# Altium PCB VapeixShield.PcbDoc
Units mm, origin at the board's own origin, x right, y up, seen from the top; angles counter-clockwise.
Board outline 70.15 x 53.67 mm, 4 copper layers (Top Layer, Mid-Layer1, Mid-Layer2, Bottom Layer), stack 1.582 mm thick; 81 components, 77 nets, 275 pads, 86 vias.
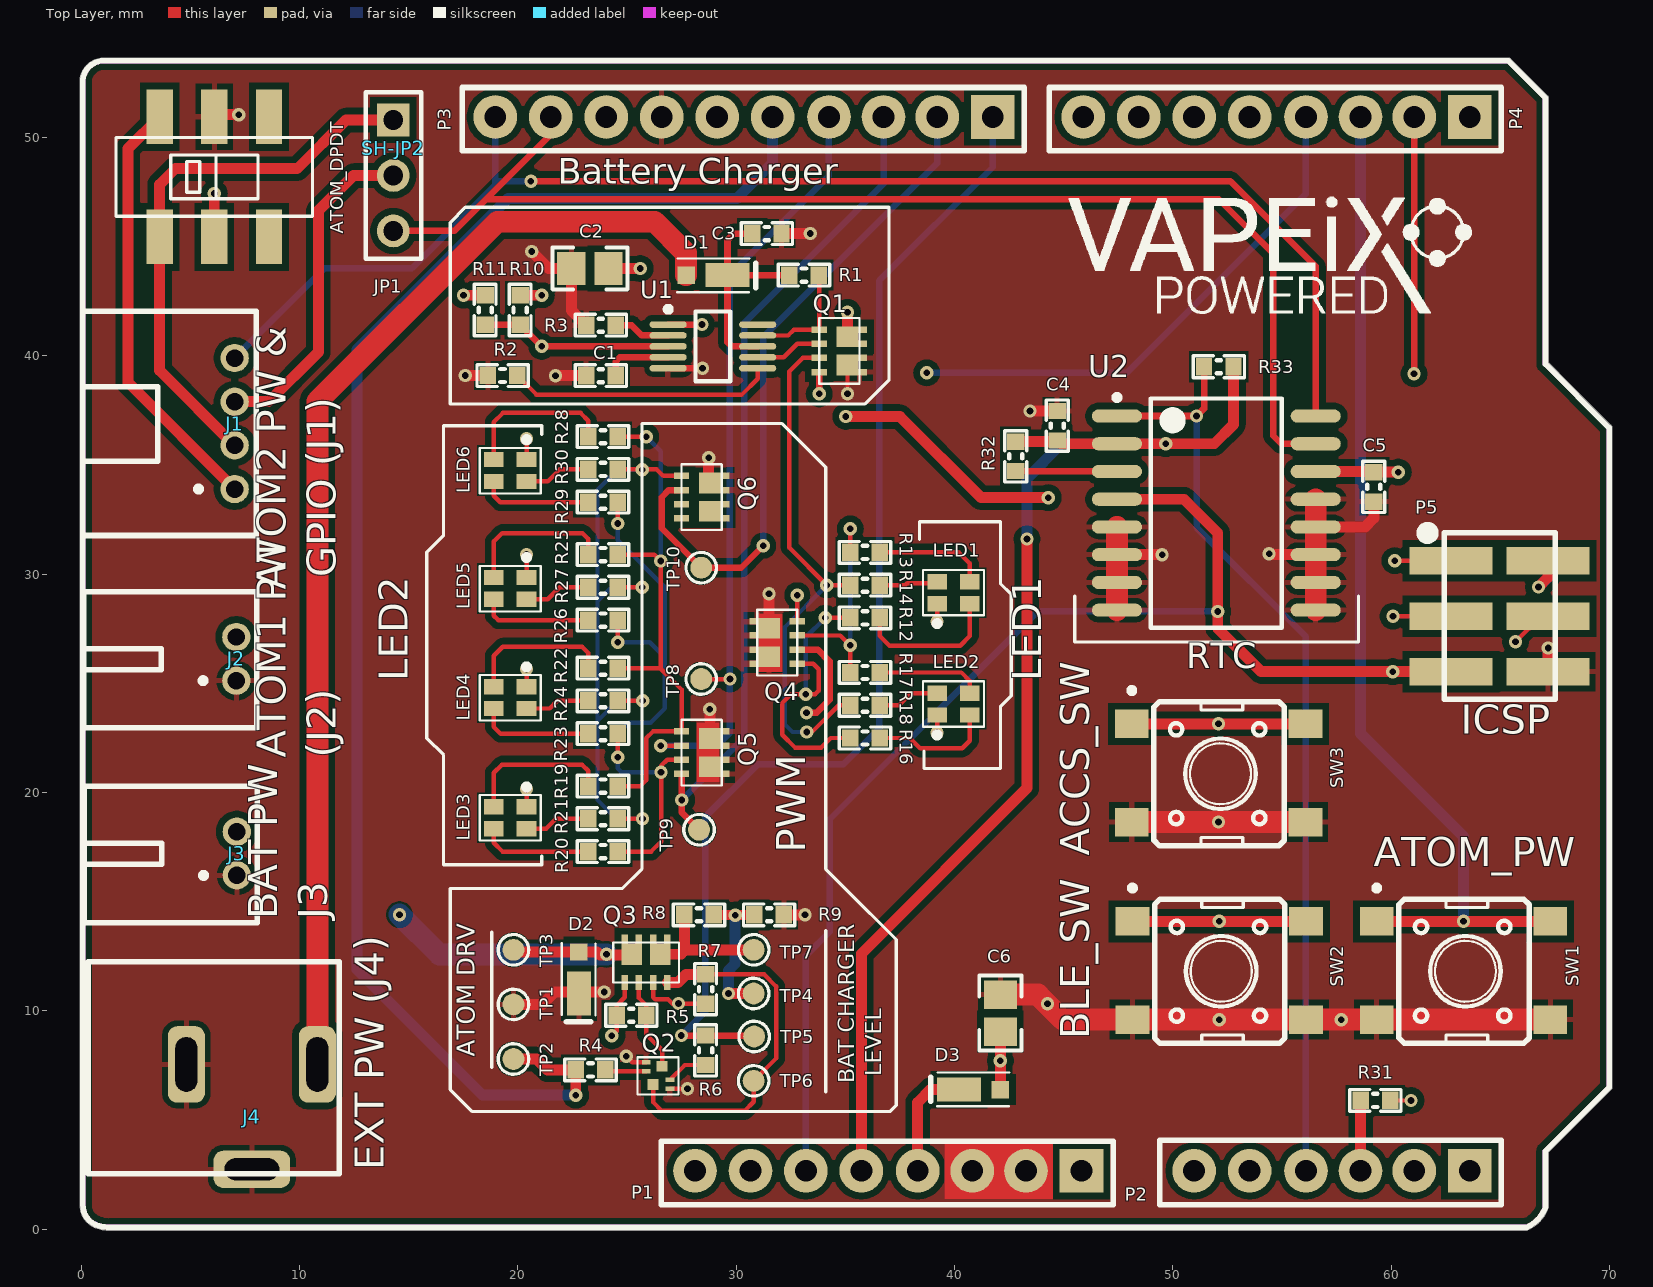
[diagram p0: Top Layer view]
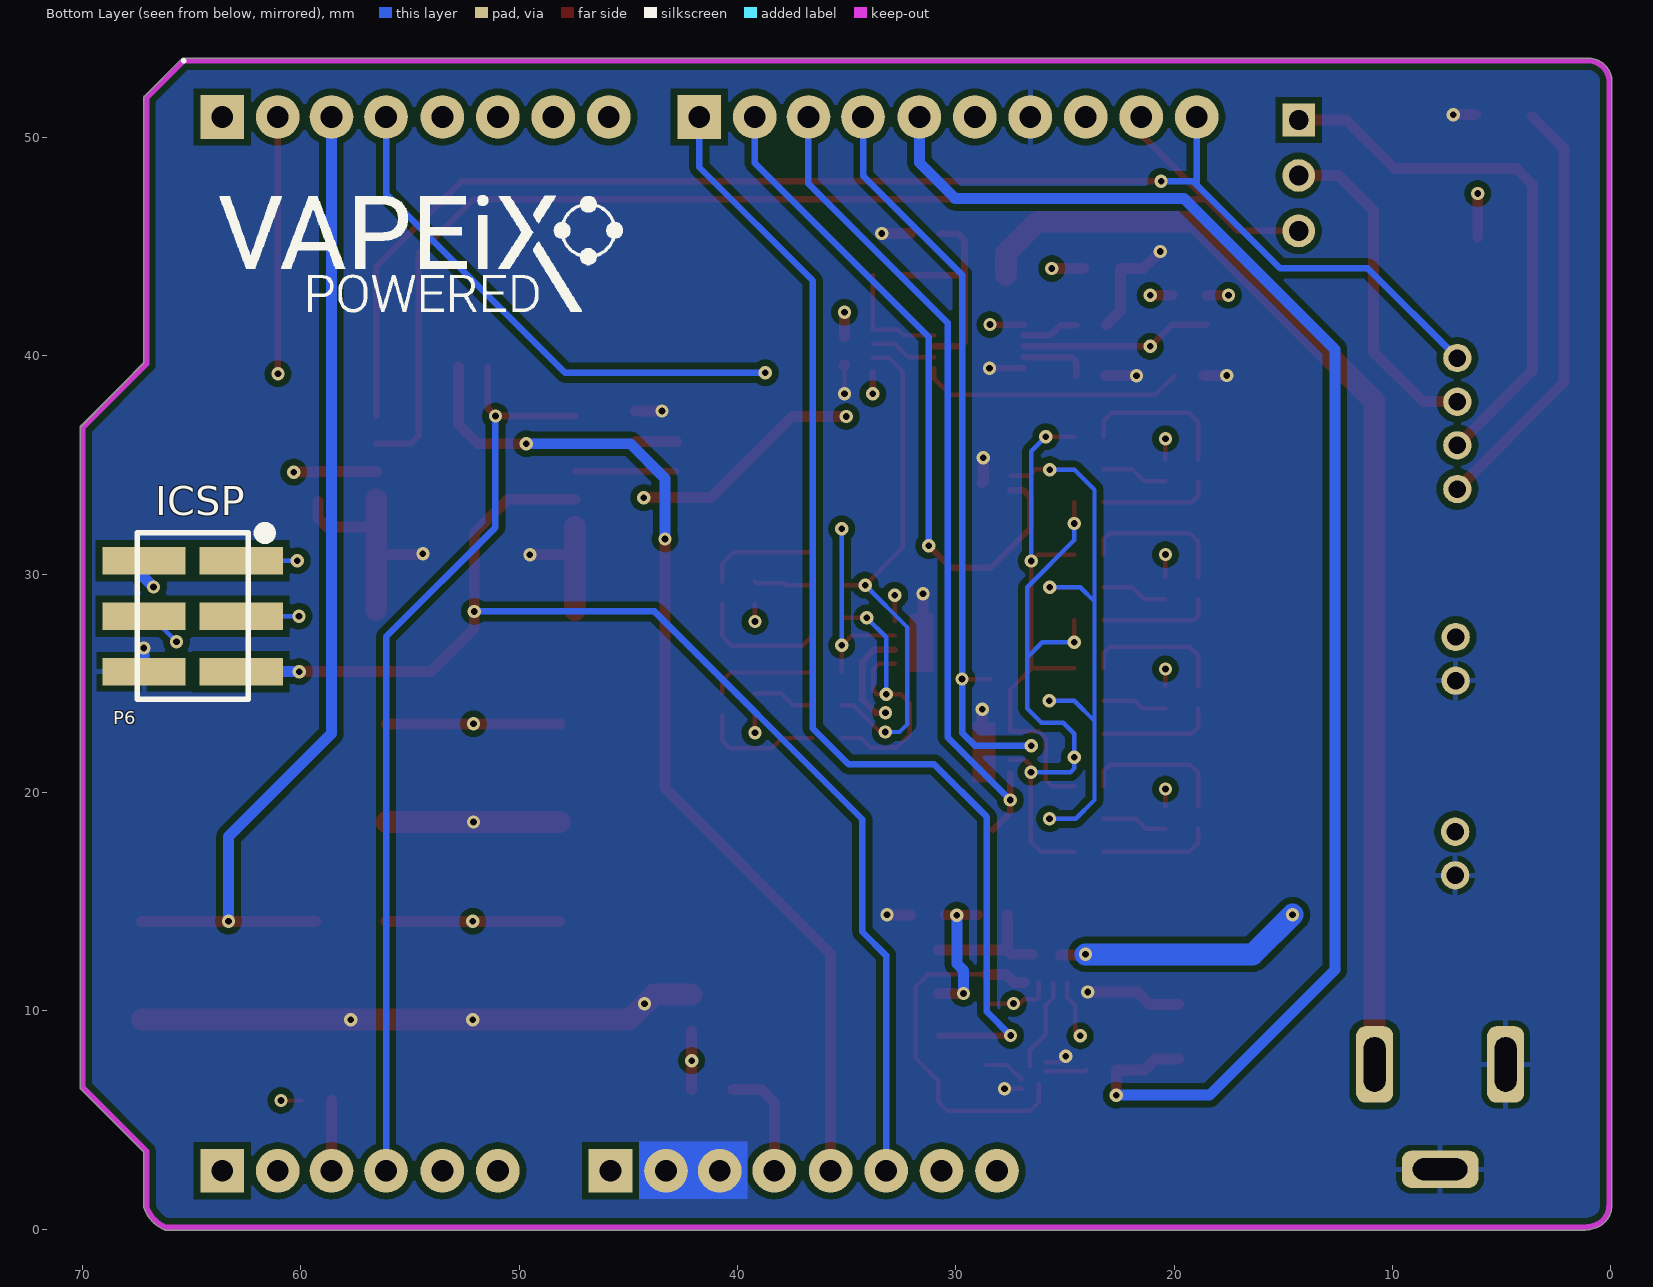
[diagram p1: Bottom Layer view, seen from below]
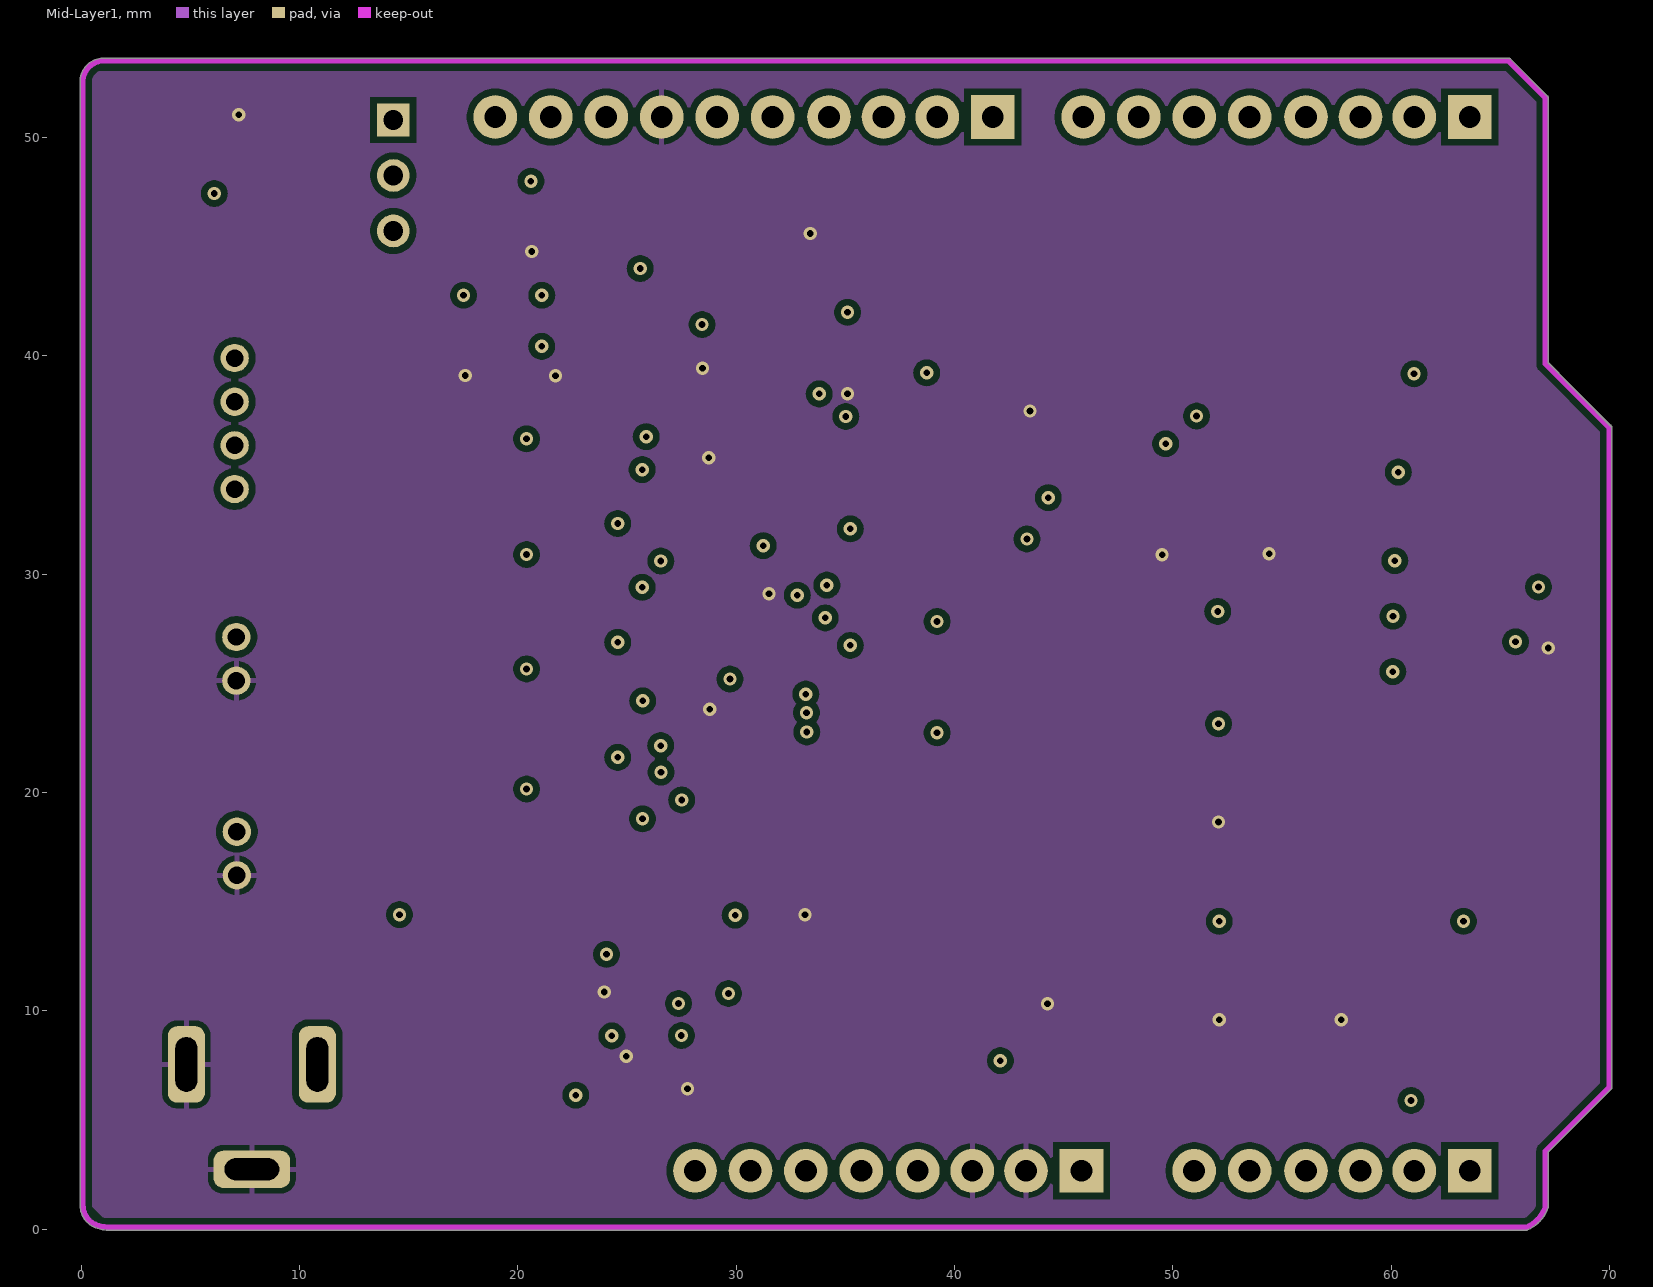
[diagram p2: Mid-Layer1]
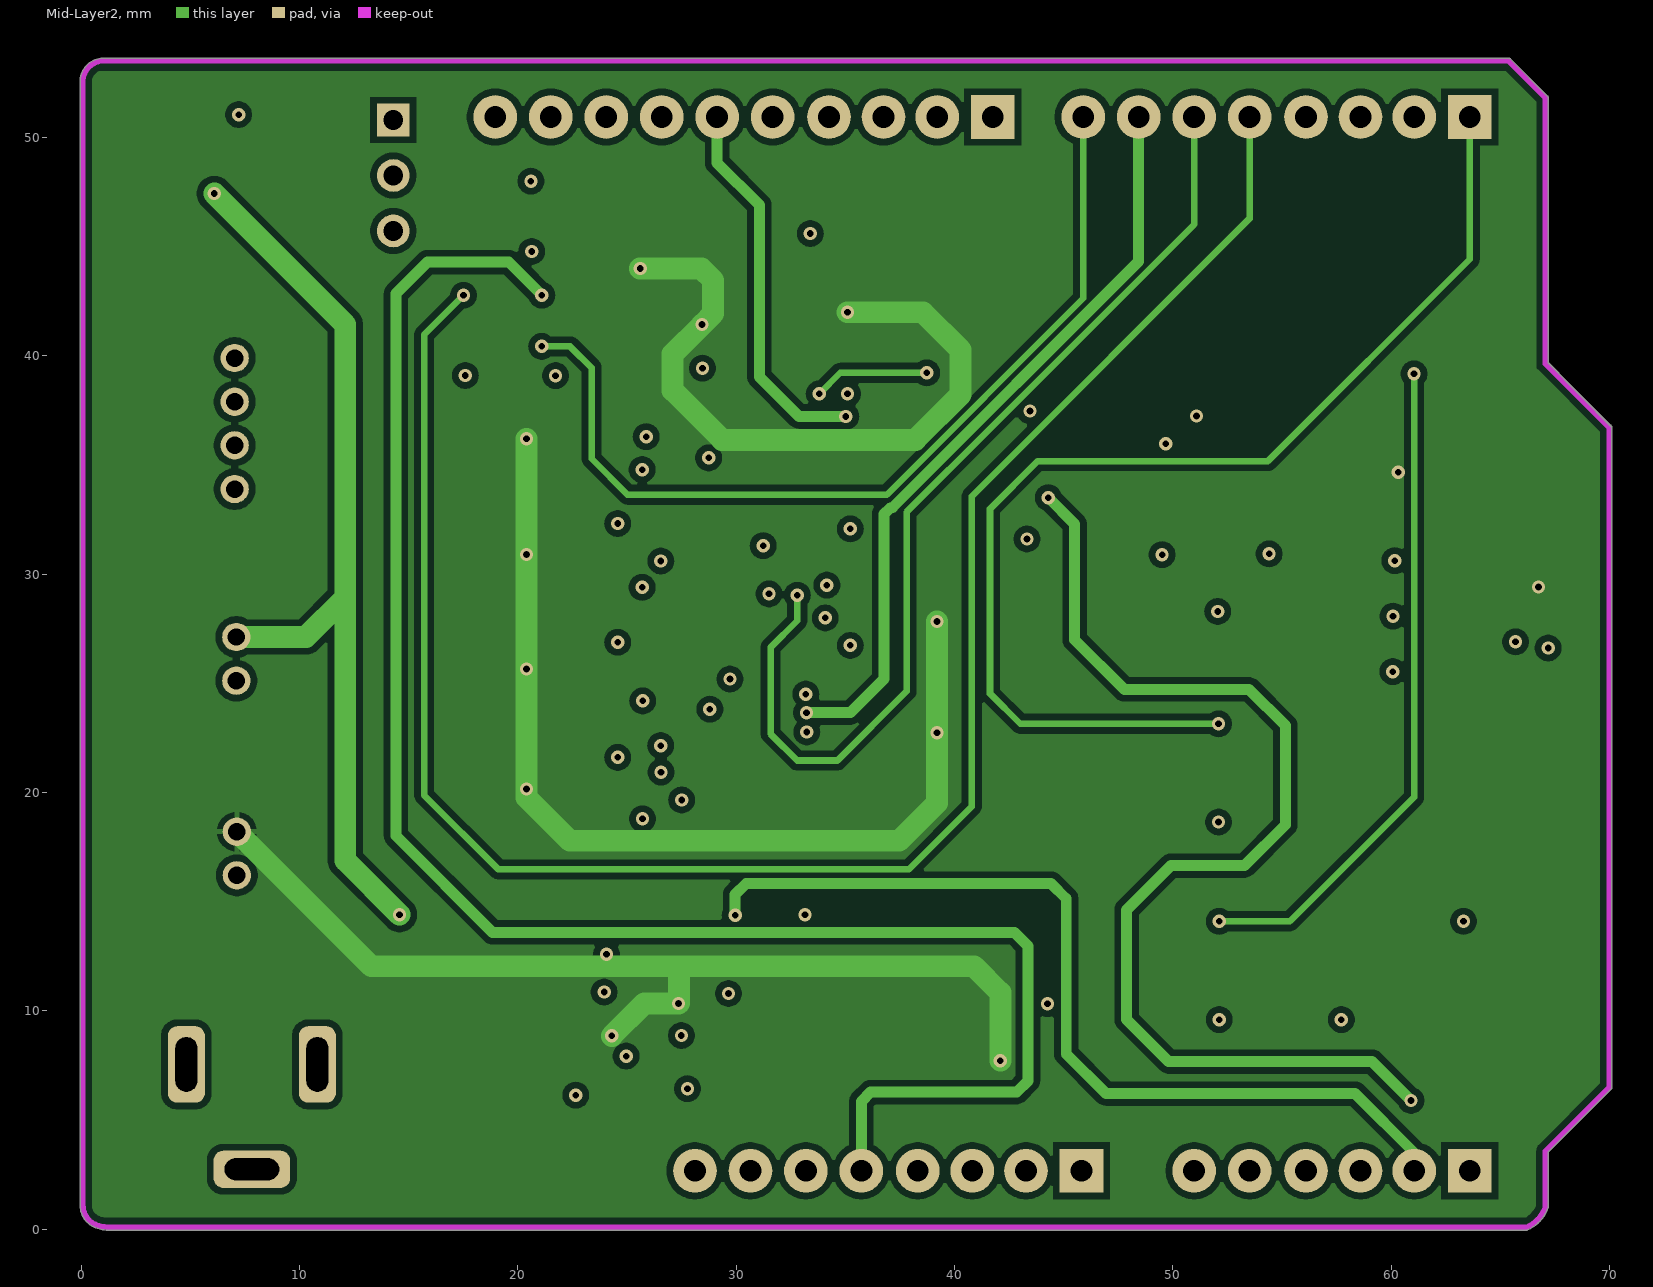
[diagram p3: Mid-Layer2]
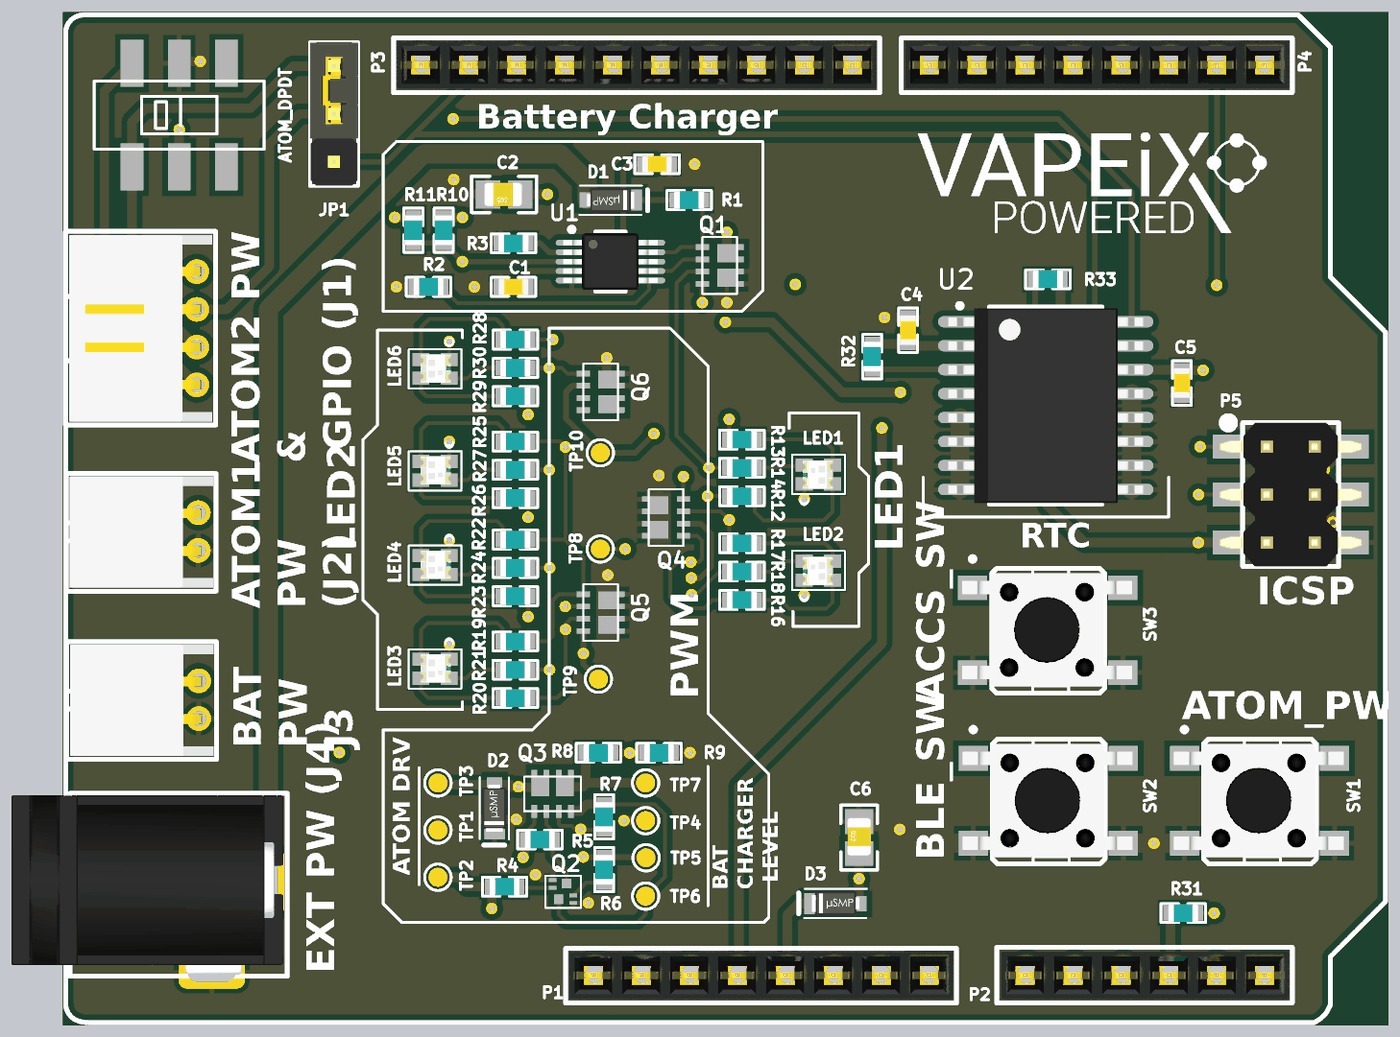
[diagram p4: 3D render of the assembled board from above, using the file's embedded part models]

## Layer stack, top to bottom
Top Solder: solder mask 0.0102, Solder Resist, Dk 3.5
Top Layer: signal copper 0.0356
Dielectric 1: prepreg 0.18, FR-4, Dk 4.4
Mid-Layer1: signal copper 0.0356
Dielectric 2: core 1.08, FR-4, Dk 4.2
Mid-Layer2: signal copper 0.0356
Dielectric 3: prepreg 0.18, FR-4, Dk 4.4
Bottom Layer: signal copper 0.0356
Bottom Solder: solder mask 0.0102, Solder Resist, Dk 3.5

## Board outline
0.145,0.484 cw(c1.045,1.096) -0.044,1.082 cw(c0.081,1.108) -0.045,1.093 cw(c0.081,1.108) -0.046,1.108 -0.046,52.626 cw(c0.081,52.626) -0.046,52.636 cw(c1.039,52.55) 1.092,53.637 65.362,53.637 cw(c65.362,53.51) 65.452,53.6 cw(c65.362,53.51) 65.453,53.599 cw(c65.364,53.508) 65.454,53.598 cw(c65.364,53.508) 65.455,53.598 67.146,51.906 67.146,51.907 cw(c67.056,51.816) 67.183,51.816 67.183,39.677 70.067,36.793 70.067,36.794 cw(c69.977,36.703) 70.104,36.707 ccw(c69.977,36.712) 70.104,36.712 ccw(c69.977,36.712) 70.067,36.802 ccw(c69.977,36.712) 70.034,36.826 70.067,36.802 67.183,39.686 70.104,36.712 70.104,6.504 cw(c69.977,6.504) 70.067,6.414 67.181,3.528 67.181,1.011 cw(c67.054,1.011) 67.174,0.968 cw(c65.569,1.543) 66.242,-0.023 cw(c66.192,0.094) 66.192,-0.033 1.371,-0.033 cw(c1.346,0.091) 1.355,-0.036 cw(c1.273,1.144) 1.05,-0.017 cw(c1.078,0.843) 0.762,0.042 cw(c0.809,0.161) 0.748,0.049 cw(c1.045,1.096)

## Design rules (kind name [scope] priority, off if disabled: settings)
Clearance Clearance_1 [inpoly] p1: gap=0.3
Clearance [All] p2: gap=0.2
ComponentClearance ComponentClearance_1 [InComponent('JP1')] p1: gap=0 collisioncheckmode=3 verticalgap=0 showdistances=FALSE
ComponentClearance [All] p2: gap=0.254 collisioncheckmode=3 verticalgap=0.254 showdistances=FALSE
HoleSize [All] p1: absolutevalues=TRUE maxlimit=8 minlimit=0.2 maxpercent=80.000 minpercent=20.000
HoleToHoleClearance [All] p1: gap=0.1 allowstackedmicrovias=TRUE
MinimumSolderMaskSliver [All] p1: minsoldermaskwidth=0.01
PlaneConnect [All] p1: planeconnectstyle=Relief reliefexpansion=0.254 reliefentries=4 reliefconductorwidth=0.254 reliefairgap=0.254
PolygonConnect PolygonConnect_1 [IsVia] p1: connectstyle=Direct reliefconductorwidth=0.254 reliefentries=4 polygonreliefangle="90 Angle" airgapwidth=0.254
PolygonConnect [All] p2: connectstyle=Relief reliefconductorwidth=0.254 reliefentries=4 polygonreliefangle="90 Angle" airgapwidth=0.254
RoutingVias [All] p1: holewidth=0.305 width=0.61 viastyle="Through Hole" minholewidth=0.305 minwidth=0.61 maxholewidth=0.711 maxwidth=1.27
ShortCircuit [All] p1: allowed=TRUE
SilkToSilkClearance [All] p1: silktosilkclearance=0.01
SilkToSolderMaskClearance [IsPad] p1: minsilkscreentomaskgap=0 clearancetoexposedcopper=TRUE
SolderMaskExpansion isvia [All] p1: expansion=0 soldermaskfromhole=TRUE
SolderMaskExpansion [All] p2: expansion=0.01
Width [All] p1: maxlimit=2 minlimit=0.2 preferedwidth=0.203
22 further rules are at their usual default settings.

## Components (designator, comment, footprint, x,y, rotation, side; value= is the part's Value field where it differs from the comment)
ATOM_DPDT "SW DPDT" JS202011SCQN 6.1,48.2 r180 top locked
C1 "" CAPC1608X06L 23.803,39.094 r180 top
C2 "Cap Pol3" C0805 23.303,44 r180 top
C3 "" CAPC1608X06L 31.403,45.6 r0 top
C4 "" CAPC1608X06L 44.7,36.8 r90 top
C5 "" CAPC1608X06L 59.2,34 r270 top
C6 "Cap Pol3" C0805 42.1,9.9 r90 top
D1 "MSS2P2-M3" MSS2P2-M3#1 29.603,43.7 r180 top
D2 "MSS2P2-M3" MSS2P2-M3#2 22.8,10.8 r90 top
D3 "MSS2P2-M3" MSS2P2-M3#1 40.2,6.4 r0 top
J1 "Atom1 (4)" S4B-PH-K-S 7.031,33.901 r90 top locked
J2 "Atom2 (2)" S2B-PH-K-S 7.111,25.125 r90 top locked
J3 "BAT_PW" S2B-PH-K-S 7.134,16.21 r90 top locked
J4 "DC JACK" "DC POWER JACK" 10.82,7.55 r0 top locked
JP1 "J4" CON3 14.3,50.8 r270 top
LED1 "HSMF-C114" HSMF-C114 39.2,28.6 r0 top
LED2 "HSMF-C114" HSMF-C114 39.2,23.5 r0 top
LED3 "HSMF-C114" HSMF-C114 20.4,19.4 r180 top
LED4 "HSMF-C114" HSMF-C114 20.4,24.9 r180 top
LED5 "HSMF-C114" HSMF-C114 20.4,29.9 r180 top
LED6 "HSMF-C114" HSMF-C114 20.4,35.3 r180 top
P1 "Header 8" LS-00008 45.812,2.68 r180 top locked
P2 "Header 6H" LS-00007 63.592,2.68 r180 top locked
P3 "Header 10" LS-00009 41.748,50.94 r180 top locked
P4 "Header 8" LS-00008 63.592,50.94 r180 top locked
P5 "TOP" "Molex 15-91-2060" 64.96,28.08 r270 top locked
P6 "BOTTOM" CLH-103-F-D-BE-K-TR 64.96,28.08 r270 bottom locked
Q1 "SI5999EDU" SI5999EDU 33.803,41.2 r270 top
Q2 "BC847CDLP-7" BC847CDLP-7 26.4,7.04 r270 top
Q3 "SI5999EDU" SI5999EDU 24.9,11.3 r0 top
Q4 "SI5999EDU" SI5999EDU 32.8,25.9 r90 top
Q5 "SI5999EDU" SI5999EDU 27.5,22.8 r270 top
Q6 "SI5999EDU" SI5999EDU 27.5,34.5 r270 top
R1 "" INDC1608X06L 33.103,43.7 r0 top
R2 "" INDC1608X06L 19.303,39.1 r180 top
R3 "" INDC1608X06L 23.803,41.406 r180 top
R4 "" INDC1608X06L 23.328,7.301 r0 top
R5 "" INDC1608X06L 25.2,9.8 r0 top
R6 "" INDC1608X06L 28.6,8.2 r270 top
R7 "" INDC1608X06L 28.6,11 r90 top
R8 "" INDC1608X06L 28.3,14.4 r0 top
R9 "" INDC1608X06L 31.509,14.4 r0 top
R10 "" INDC1608X06L 20.103,42.1 r270 top
R11 "" INDC1608X06L 18.503,42.1 r90 top
R12 "" INDC1608X06L 35.9,28 r180 top
R13 "" INDC1608X06L 35.9,31 r180 top
R14 "" INDC1608X06L 35.9,29.5 r180 top
R16 "" INDC1608X06L 35.9,22.5 r180 top
R17 "" INDC1608X06L 35.9,25.5 r180 top
R18 "" INDC1608X06L 35.9,24 r180 top
R19 "" INDC1608X06L 23.9,20.3 r0 top
R20 "" INDC1608X06L 23.9,17.3 r0 top
R21 "" INDC1608X06L 23.9,18.8 r0 top
R22 "" INDC1608X06L 23.9,25.7 r0 top
R23 "" INDC1608X06L 23.9,22.7 r0 top
R24 "" INDC1608X06L 23.9,24.2 r0 top
R25 "" INDC1608X06L 23.9,30.9 r0 top
R26 "" INDC1608X06L 23.9,27.9 r0 top
R27 "" INDC1608X06L 23.9,29.4 r0 top
R28 "" INDC1608X06L 23.9,36.3 r0 top
R29 "" INDC1608X06L 23.9,33.3 r0 top
R30 "" INDC1608X06L 23.9,34.8 r0 top
R31 "" INDC1608X06L 59.271,5.901 r180 top
R32 "" INDC1608X06L 42.8,35.4 r270 top
R33 "" INDC1608X06L 52.1,39.5 r180 top
SH-JP2 "969102-0000-DA" SNT-100-BK-G 14.3,49.5 r90 top
SW1 "Atomizer_Power_Button" PTS645SH50SMTR92 59.333,14.104 r0 top locked
SW2 "Bluetooth Button" PTS645SH50SMTR92 48.146,14.104 r0 top locked
SW3 "Accessory Button" PTS645SH50SMTR92 48.115,23.15 r0 top locked
TP1 "TP" TP 19.8,10.3 r0 top
TP2 "TP" TP 19.8,7.8 r90 top
TP3 "TP" TP 19.8,12.8 r90 top
TP4 "TP" TP 30.8,10.8 r90 top
TP5 "TP" TP 30.823,8.831 r90 top
TP6 "TP" TP 30.8,6.8 r90 top
TP7 "TP" TP 30.8,12.8 r90 top
TP8 "TP" TP 28.4,25.2 r180 top
TP9 "TP" TP 28.3,18.3 r180 top
TP10 "TP" TP 28.4,30.3 r180 top
U1 "LTC4050EMS" LTC4050EMS 26.903,41.45 r270 top locked
U2 "DS3231SN" DS3231SN 52,32.8 r0 top locked

## Footprints (in the part's own frame and the unit in brackets; to place one, negate y for a bottom-side part, rotate by r counter-clockwise, add the part's x,y. Pads: shape width x height; smd on the part's side, far side on the other; paste and mask are expansions set on the pad)
BC847CDLP-7 [mm] "TRANS 2NPN 45V 0.1A 6DFN"
  rect 0.2x0.4 smd: 1(-0.609,-0.521) 2(-0.203,-0.521) 4(0.6,0.572) 5(0.196,0.572)
  rect 0.5x0.5 smd: 3(-0.426,0.208) 6(0.404,-0.208)
  silkscreen extent -0.84,-0.91 0.86,0.97, body extent -0.79,-0.67 0.81,0.69, height 0.4
C0805 [mm]
  rect 1.3x1.5 smd: 1(-0.85,0) 2(0.85,0)
  silkscreen extent -1.72,-0.97 1.72,0.97, body extent -0.95,-0.62 1.05,0.63, height 0.78
CAPC1608X06L [mm]
  rect 0.75x0.8 smd: 1(-0.675,0) 2(0.675,0)
  silkscreen extent -1.17,-0.5 1.18,0.5, body extent -0.8,-0.43 0.8,0.43, height 0.8
CLH-103-F-D-BE-K-TR [mm] "SAMTEC - CLH-103-F-D-BE-K-TR - SOCKET, 2.54MM, SMT, 6WAY"
  rect 1.27x3.81 smd: 1(-2.54,2.234) 2(-2.54,-2.211) 3(0,2.234) 4(0,-2.211) 5(2.54,2.234) 6(2.54,-2.211)
  silkscreen extent -4.06,-2.53 3.81,3.57, body extent -3.81,-3.54 3.81,3.57, height 3.56
CON3 [mm]
  rect 1.5x1.5 hole 0.9: 1(0,0)
  round 1.5 hole 0.9: 2(2.54,0) 3(5.08,0)
  silkscreen extent -1.27,-1.27 6.35,1.27, body extent -1.27,-1.24 6.35,1.25, height 8.54
"DC POWER JACK" [mm] "Adafruit Accessories 2.1mm DC Barrel Jack Breadboard Friendly"
  rrect50% 1.7x3.5 hole 1 slot 2.5 at 90 deg: 1(0,0) 2(-6,0)
  rrect50% 3.5x1.7 hole 1 slot 2.5 at 0 deg: 3(-3,-4.8)
  silkscreen extent -10.5,-5 1,4.7, body extent -13.6,-4.9 0.8,4.6, height 11
DS3231SN [mm] "IC RTC CLK/CALENDAR I2C 16-SOIC"
  oval 2.3x0.6 smd: 1(-4.563,4.445) 2(-4.563,3.175) 3(-4.563,1.905) 4(-4.563,0.635) 5(-4.563,-0.635) 6(-4.563,-1.905) 7(-4.563,-3.175) 8(-4.563,-4.445) 9(4.537,-4.445) 10(4.537,-3.175) 11(4.537,-1.905) 12(4.537,-0.635) 13(4.537,0.635) 14(4.537,1.905) 15(4.537,3.175) 16(4.537,4.445)
  silkscreen extent -4.69,-5.25 2.99,5.42, body extent -5.17,-5.17 5.14,5.16, height 2.48
HSMF-C114 [mm] "LED RGB DIFFUSED 0606 SMD"
  rect 0.9x0.7 smd: 1(0,0.051) 2(0,1.049) 3(1.5,1.049) 4(1.5,0.051)
  silkscreen extent -0.65,-0.96 2.15,1.6, body extent -0.09,-0.22 1.51,1.28, height 0.34
INDC1608X06L [mm]
  rect 0.75x0.8 smd: 1(-0.675,0) 2(0.675,0)
  silkscreen extent -1.18,-0.5 1.17,0.5, body extent -0.8,-0.48 0.8,0.48, height 0.8
JS202011SCQN [mm] "SWITCH SLIDE DPDT 300MA 6V"
  rect 1.2x2.5 smd: 1(-2.5,-2.75) 2(0,-2.75) 3(2.5,-2.75) 4(-2.5,2.75) 5(0,2.75) 6(2.5,2.75)
  silkscreen extent -4.5,-1.8 4.5,1.8, body extent -4.52,-3.75 4.52,3.75, height 5.5
LS-00007 [mm] "Arduino Female Stackable Header - 6 pin(4 pack)"
  rect 2x2 hole 1: 1(0,0)
  round 2 hole 1: 2(2.54,0) 3(5,0) 4(7.5,0) 5(10.08,0) 6(12.62,0)
  silkscreen extent -1.45,-1.4 14.2,1.55, body extent -1.27,-1.19 13.97,1.35, height 8.5
LS-00008 [mm] "Arduino Femal e Stackable Headers - 8 pin (4 pack)"
  rect 2x2 hole 1: 1(0,0)
  round 2 hole 1: 2(2.54,0) 3(5,0) 4(7.5,0) 5(10.08,0) 6(12.62,0) 7(15.16,0) 8(17.7,0)
  silkscreen extent -1.45,-1.35 19.25,1.55, body extent -1.27,-1.19 19.05,1.35, height 8.5
LS-00009 [mm] "Arduino Female Stackable Header - 10 pin (4 pack)"
  rect 2x2 hole 1: 1(0,0)
  round 2 hole 1: 2(2.54,0) 3(5,0) 4(7.5,0) 5(10.08,0) 6(12.62,0) 7(15.16,0) 8(17.7,0) 9(20.24,0) 10(22.78,0)
  silkscreen extent -1.45,-1.35 24.3,1.55, body extent -1.27,-1.19 24.13,1.35, height 8.5
LTC4050EMS [mm] "IC BATT CHRG CNTRL LI-ION 10MSOP"
  oval 0.3x1.7 smd: 1(0.016,-0.018) 2(0.516,-0.018) 3(1.016,-0.018) 4(1.516,-0.018) 5(2.016,-0.018) 6(2.016,4.082) 7(1.516,4.082) 8(1.016,4.082) 9(0.516,4.082) 10(0.016,4.082)
  silkscreen extent -0.81,-0.14 2.62,2.83, body extent -0.48,-0.48 2.52,4.55, height 1.05
"Molex 15-91-2060" [mil] "CONN HEADER 6POS .100\" VERT TIN"
  rect 50x150 smd: 1(-100,-87.5) 2(-100,87.5) 3(0,-87.5) 4(0,87.5) 5(100,-87.5) 6(100,87.5)
  silkscreen extent -160,-140 150,100, body extent -150,-148 150,148, height 382
MSS2P2-M3#1 [mm] "DIODE SCHOTTKY 20V 2A MICROSMP"
  rect 0.8x0.8 smd: 1(1.9,0)
  rect 2x1.1 smd: 2(0,0)
  silkscreen extent -1.3,-0.76 2.31,0.79, body extent -0.59,-0.64 1.91,0.66, height 0.66
MSS2P2-M3#2 [mm] "DIODE SCHOTTKY 20V 2A MICROSMP"
  rect 2x1.1 smd: 1(0,0)
  rect 0.8x0.8 smd: 2(1.9,0)
  silkscreen extent -1.3,-0.76 2.31,0.79, body extent -0.59,-0.64 1.91,0.66, height 0.66
PTS645SH50SMTR92 [mm] "SWITCH TACTILE SPST-NO 0.05A 12V"
  rect 1.55x1.3 smd: 1(0,0) 1(7.95,0) 2(0,-4.5) 2(7.95,-4.5)
  silkscreen extent -0.12,-5.59 6.99,1.65, body extent -0.56,-5.24 8.44,0.76, height 4.3
S2B-PH-K-S [mm] "CONN HEADER PH SIDE 2POS 2MM"
  round 1.3 hole 0.8: 1(0,0) 2(2,0)
  silkscreen extent -2.16,-0.94 4.07,6.98, body extent -1.98,-0.78 3.92,6.82, height 4.8
S4B-PH-K-S [mm] "CONN HEADER PH SIDE 4POS 2MM"
  round 1.3 hole 0.8: 1(0,0) 2(2,0) 3(4,0) 4(6,0)
  silkscreen extent -2.13,-1 8.14,6.96, body extent -1.95,-0.83 7.95,6.77, height 4.8
SI5999EDU [mm] "MOSFET 2P-CH 20V 6A POWERPAK"
  rect 0.3x0.7 smd: 1(0,0) 2(0.648,0) 3(1.295,0) 4(1.945,0) 5(1.295,1.842) 5(1.945,1.842) 7(0,1.841) 7(0.648,1.841)
  rect 0.945x1 smd: 5(1.619,1.296)
  rect 0.947x1 smd: 7(0.323,1.296)
  silkscreen extent -0.53,0 2.48,1.84, body extent -0.43,0.07 2.35,1.77, height 0.85
SNT-100-BK-G [mil] "Samtec STEP model"
  round 1 on Mech3: 0(0,0)
  body extent -100,-50 100,50, height 344
TP [mm] "Test Point"
  round 1 smd paste-5: 1(0,0)
  silkscreen extent -0.7,-0.7 0.7,0.7

## Part data
ATOM_DPDT: library part JS202011SCQN, "SWITCH SLIDE DPDT 300MA 6V"
C1 C3 C4 C5: library part GRM219R61A106KE44D, "CAP, CERM, 10 µF, 10 V, +/- 10%, X5R, 0805"
C2 C6: "Polarized Capacitor (Surface Mount)"
D1 D2 D3: library part MSS2P2-M3/89A, "DIODE SCHOTTKY 20V 2A MICROSMP"
J1: library part S4B-PH-K-S(LF)(SN), "CONN HEADER PH SIDE 4POS 2MM"
J2 J3: library part S2B-PH-K-S(LF)(SN), "CONN HEADER PH SIDE 2POS 2MM"
J4: library part "DC POWER JACK", "Adafruit Accessories 2.1mm DC Barrel Jack Breadboard Friendly"
JP1: library part PEC03SAAN, "Header, 100mil, 3x1, Tin plated, TH"
LED1 LED2 LED3 LED4 LED5 LED6: "LED RGB DIFFUSED 0606 SMD"
P1 P4: library part LS-00008, "Arduino Femal e Stackable Headers - 8 pin (4 pack)"
P2: "Header, 6-Pin, Right Angle"
P3: library part LS-00009, "Arduino Female Stackable Header - 10 pin (4 pack)"
P5: library part 0015912060, "CONN HEADER 6POS .100\" VERT TIN"
P6: library part M20-7870346, "Headers & Wire Housings 03+03 DIL SMT SKT BOTTOM ENTRY TIN"
Q1 Q3 Q4 Q5 Q6: library part SI5999EDU-T1-GE3, "MOSFET 2P-CH 20V 6A POWERPAK"
Q2: "TRANS 2NPN 45V 0.1A 6DFN"
R1 R2 R3 R4 R5 R6 R7 R8 R9 R10 R11 R12 R13 R14 R16 R17 R18 R19 R20 R21 R22 R23 R24 R25 R26 R27 R28 R29 R30 R31 R32 R33: library part Res2, "Resistor"
SH-JP2: "Shunt, 100mil, Gold plated, Black"
SW1 SW2 SW3: library part "PTS645SH50SMTR92 LFS", "SWITCH TACTILE SPST-NO 0.05A 12V"
TP1 TP2 TP3 TP4 TP5 TP6 TP7 TP8 TP9 TP10: "TEST POINT"
U1: library part LTC4050EMS-4.1#PBF, "IC BATT CHRG CNTRL LI-ION 10MSOP"
U2: library part DS3231SN#T&R, "IC RTC CLK/CALENDAR I2C 16-SOIC"

## Via types
v1: diameter 0.61, hole 0.305, Top Layer to Bottom Layer, 86 vias

## Nets (pads, with @x,y where several pads share a name; then routed paths per layer and width w, separated by ;. In a path a pad name is that pad's centre, name@x,y a point inside that pad or via, vN(x,y) a via of type N, cw(c..) or ccw(c..) an arc to the next point about the centre after c; other vN are vias at no path point)
3V3: C4.1 P1.5 R10.1 R32.1 R33.1 U2.2 | length 137.1
  Top Layer w0.203: C4.1@44.65,36.075 C4.1 C4.1@44.85,35.975
  Top Layer w0.5: R10.1 v1(21.101,42.775) ; P1.5 35.732,12.622 43.314,20.204 v1(43.314,31.614) ; R32.1 C4.1@44.65,36.075 ; C4.1@44.85,35.975 U2.2 v1(49.666,35.975) 51.894,35.975 52.775,36.856 R33.1
  Mid-Layer2 w0.5: v1(21.101,42.775) 19.586,44.29 15.862,44.29 14.42,42.848 14.42,18.025 18.849,13.596 42.745,13.596 43.363,12.978 43.363,6.798 42.848,6.283 36.153,6.283 35.732,5.862 P1.5
  Bottom Layer w0.5: v1(43.314,31.614) 43.314,34.389 44.901,35.975 v1(49.666,35.975)
32KHZ: P2.4 R33.2 U2.1 | length 42.7
  Top Layer w0.3: U2.1 v1(51.082,37.245) 51.425,37.588 R33.2
  Bottom Layer w0.3: v1(51.082,37.245) 51.082,32.142 56.092,27.132 P2.4
A0: P2.6
A1: P2.5
ACCESSORY_SW: P4.1 SW3.1 | length 60.7
  Top Layer w0.5: SW3.1@48.115,23.15 v1(52.09,23.15) SW3.1@56.065,23.15
  Mid-Layer2 w0.3: v1(52.09,23.15) 43.004,23.15 41.622,24.532 41.622,32.992 43.813,35.183 54.351,35.183 63.592,44.424 P4.1
AREF: P3.8
ATM1-1: ATOM_DPDT.5 D2.2 J2.2 Q3.7 TP3.1 | length 68.3
  Top Layer w0.203: TP3.1 TP3.1@19.9,12.7 ; Q3.7@25.198,12.571 Q3.7@25.223,12.596
  Top Layer w0.5: ATOM_DPDT.5 v1@6.1,47.434 ; TP3.1@19.9,12.7 D2.2 23.626,12.7 23.755,12.571 Q3.7@25.198,12.571
  Mid-Layer2 w0.203: 15.964,12.061 23.528,12.061 v1(24.06,12.593)
  Mid-Layer2 w1: v1(6.103,47.434) 12.1,41.437 12.1,28.931 ; J2.2 10.294,27.125 12.1,28.931 ; v1(14.581,14.413) 12.1,16.894 12.1,28.931
  Bottom Layer w1: v1(14.581,14.413) 16.4,12.593 v1(24.06,12.593)
ATM2-0: ATOM_DPDT.3 J1.1 | length 19.7
  Top Layer w0.5: ATOM_DPDT.3 2.143,49.493 2.143,38.79 J1.1
ATM2-1: ATOM_DPDT.6 J1.2 JP1.1 | length 25.3
  Top Layer w0.5: J1.2 3.6,39.333 ATOM_DPDT.6 3.6,47.856 4.315,48.571 9.897,48.571 12.126,50.8 JP1.1
ATM2-PW-SDA: J1.3 JP1.2 | length 15.3
  Top Layer w0.5: J1.3 8.588,37.901 10.866,40.179 10.866,46.65 12.476,48.26 JP1.2
ATOM_PW: P4.3 SW1.1 | length 46.7
  Top Layer w0.5: SW1.1@59.333,14.104 v1(63.308,14.104) SW1.1@67.283,14.104
  Bottom Layer w0.5: P4.3 58.592,22.703 63.308,17.987 v1(63.308,14.104)
ATOMIZER: P3.5 R4.1 TP2.1 | length 69.7
  Top Layer w0.5: TP2.1 20.862,7.8 21.361,7.301 R4.1 v1(22.653,6.143)
  Bottom Layer w0.5: v1(22.653,6.143) 18.385,6.143 12.642,11.886 12.642,40.292 19.556,47.206 30.029,47.206 31.668,48.846 P3.5
B_CH1: P4.7 Q4.2 | length 39.6
  Top Layer w0.3: Q4.2 33.735,26.548 34.277,26.006 34.277,24.248 33.692,23.663 v1(33.218,23.663)
  Mid-Layer2 w0.5: v1(33.218,23.663) 35.238,23.663 36.771,25.196 36.771,32.754 37.061,33.044 37.15,33.044 48.432,44.326 P4.7
B_CH2/MOSI: P3.4 Q5.2 TP8.1 | length 35.8
  Top Layer w0.203: v1(26.543,22.152) Q5.2 ; TP8.1 v1(29.716,25.2)
  Bottom Layer w0.3: v1(26.543,22.152) 29.125,22.152 29.716,22.743 v1(29.716,25.2) 29.716,43.716 34.248,48.248 P3.4
BAT+: C2.1 C5.1 C6.1 D3.1 J3.2 LED1.1 LED2.1 LED3.1 LED4.1 LED5.1 LED6.1 P5.2 P6.2 Q1.7 Q3.1 Q3.3 R5.1 R7.1 U1.1 U2.14 | length 148.2
  Top Layer w0.203: LED3.1 v1(20.4,20.164) ; LED4.1 v1(20.4,25.664) ; LED5.1 v1(20.4,30.9) ; LED6.1@20.4,35.249 v1(20.4,36.2) ; v1(24.308,8.858) 24.525,9.075 R5.1 24.525,10.248 24.9,10.623 Q3.1 ; Q3.3 26.195,10.625 26.289,10.531 26.877,10.531 27.084,10.325 R7.1 ; v1(39.2,22.736) LED2.1 ; v1(39.2,27.836) LED1.1
  Top Layer w0.3: U1.1 v1(28.437,41.434)
  Top Layer w0.5: C2.1 v1(25.603,44) ; Q1.7@35.099,40.877 v1(35.099,41.996) ; D3.1 v1(42.1,7.725) C6.1 ; U2.14 C5.1@59.17,34.705 ; C5.1 v1(60.322,34.675) ; v1(66.738,29.415) 67.183,29.859 P5.2
  Mid-Layer2 w1: J3.2 13.293,12.051 40.891,12.051 42.1,10.842 v1(42.1,7.725) ; v1@20.4,36.2 v1(20.4,30.9) v1(20.4,25.664) v1(20.4,20.164) 20.4,19.77 22.375,17.795 37.468,17.795 39.2,19.527 v1(39.2,22.736) v1(39.2,27.836) ; v1(24.308,8.858) 25.79,10.34 v1(27.36,10.34) 27.377,10.357 27.377,11.927 ; v1(25.603,44) 28.409,44 28.943,43.466 28.943,41.94 v1(28.437,41.434) 27.089,40.086 27.089,38.419 29.355,36.153 38.208,36.153 40.273,38.218 40.273,40.273 38.55,41.996 v1(35.099,41.996)
  Bottom Layer w0.5: v1(66.738,29.415) 67.171,29.847 P6.2
BAT_SENSE: P2.2 R8.2 R9.1 TP4.1 | length 48.8
  Top Layer w0.45: R8.2 R9.1@30.525,14.4
  Top Layer w0.5: v1(29.648,10.8) TP4.1
  Mid-Layer2 w0.5: v1(29.954,14.388) 29.954,15.328 30.461,15.835 44.42,15.835 45.114,15.141 45.114,8.034 46.929,6.219 58.342,6.219 61.052,3.508 P2.2
  Bottom Layer w0.5: v1(29.648,10.8) 29.648,11.856 29.954,12.162 v1(29.954,14.388)
BAT_SENSE_EN: P3.1 R6.1 TP5.1 | length 53.6
  Top Layer w0.203: TP5.1@30.779,8.875 TP5.1
  Top Layer w0.3: v1(27.492,8.875) R6.1 TP5.1@30.779,8.875
  Bottom Layer w0.3: v1(27.492,8.875) 28.578,9.961 28.578,18.878 30.992,21.292 34.908,21.292 36.555,22.939 36.555,43.445 41.748,48.638 P3.1
BLE_SW: P4.2 SW2.1 | length 50.4
  Top Layer w0.3: v1@61.052,39.179 P4.2
  Top Layer w0.5: SW2.1@48.146,14.104 v1(52.121,14.104) SW2.1@56.096,14.104
  Mid-Layer2 w0.3: v1(52.121,14.104) 55.356,14.104 61.044,19.792 v1(61.044,39.179)
CARTRIDGE_EN: P3.6 R31.1 | length 80.5
  Top Layer w0.203: R31.1 v1(60.904,5.901)
  Top Layer w0.5: v1(35.02,37.223) 37.493,37.223 41.211,33.506 v1(44.291,33.506)
  Mid-Layer2 w0.5: P3.6 29.128,48.833 31.06,46.9 31.06,39.038 32.875,37.223 v1(35.02,37.223) ; v1(44.291,33.506) 45.5,32.297 45.5,27.001 47.775,24.726 53.492,24.726 55.148,23.07 55.148,18.528 53.278,16.658 49.912,16.658 47.882,14.628 47.882,9.606 49.805,7.682 59.123,7.682 v1(60.904,5.901)
CARTRIDGE_SENSE: P2.3 R31.2 | length 3.2
  Top Layer w0.5: P2.3 R31.2@58.592,5.901
CHRG: P4.5 R11.2 | length 89.2
  Top Layer w0.5: v1(17.514,42.775) R11.2
  Mid-Layer2 w0.3: v1(17.514,42.775) 15.71,40.971 15.71,19.883 19.113,16.48 37.904,16.48 40.788,19.364 40.788,33.563 53.512,46.287 P4.5
EMPTY1: ATOM_DPDT.1
EMPTY2: ATOM_DPDT.4
G_CH1: P4.6 Q4.4 | length 47.8
  Top Layer w0.203: Q4.4 v1(32.8,29.038)
  Mid-Layer2 w0.3: v1(32.8,29.038) 32.8,27.873 31.576,26.649 31.576,22.688 32.793,21.471 34.635,21.471 37.801,24.637 37.801,32.847 41.736,36.782 50.972,46.018 P4.6
G_CH2/SS: P3.3 Q5.4 TP9.1 | length 38
  Top Layer w0.3: Q5.4 27.5,19.1 TP9.1
  Bottom Layer w0.3: v1(27.503,19.662) 30.375,22.535 30.375,41.511 36.748,47.884 P3.3
GND: ATOM_DPDT.2 C1.2 C2.2 C3.2 C4.2 C5.2 C6.2 D2.1 J2.1 J3.1 J4.2 J4.3 P1.2 P1.3 P3.7 P5.6 P6.6 Q1.5 Q2.1 Q2.4 Q4.5 Q4.7 Q5.5 Q5.7 Q6.7 R2.2 R3.2 R9.2 SW1.2 SW2.2 SW3.2 TP1.1 U1.5 U2.5 U2.6 U2.7 U2.8 U2.9 U2.10 U2.11 U2.12 U2.13 | length 79.1
  Top Layer w0.203: ATOM_DPDT.2 ATOM_DPDT.2@6.199,51.049 ; D2.1 22.866,10.866 v1(23.951,10.866) ; v1(24.961,7.933) 25.245,7.649 Q2.1 ; Q2.4 v1(27.767,6.44) ; v1(35.099,38.259) Q1.5@35.099,39.581
  Top Layer w0.3: U1.5 v1(28.455,39.434)
  Top Layer w0.5: ATOM_DPDT.2@6.199,51.049 v1(7.213,51.049) ; v1(17.597,39.1) R2.2 ; TP1.1 21.119,10.3 21.685,10.866 v1(23.951,10.866) ; v1(20.635,44.779) 21.415,44 C2.2 22.453,42.081 R3.2 ; v1(21.728,39.094) C1.2 ; v1(28.737,35.329) 28.737,34.236 Q6.7@28.796,34.177 ; Q5.7@28.796,22.477 v1(28.796,23.819) ; Q4.5@31.504,27.519 v1(31.504,29.101) ; C3.2 v1(33.396,45.6) ; R9.2@32.081,14.4 v1(33.148,14.4) ; Q1.5@35.099,39.581 Q1.5@35.122,39.558 ; v1(43.453,37.475) C4.2 ; U2.6 v1(49.504,30.895) ; v1@54.404,30.895 U2.11 ; U2.12 58.796,32.165 59.2,32.569 C5.2 ; P5.6 v1(67.183,26.62)
  Top Layer w1: C6.2 43.815,10.75 44.961,9.604 48.146,9.604 56.096,9.604 v1(57.714,9.604) 59.333,9.604 SW1.2@67.283,9.604 ; U2.8 U2.7 U2.6 U2.5 ; SW3.2@48.115,18.65 SW3.2@56.065,18.65 ; U2.9 U2.10 U2.11 U2.12 U2.13
  Bottom Layer w0.203: v1@67.171,26.608 v1(67.183,26.62)
  Bottom Layer w0.5: P6.6 v1@67.171,26.608
  other v1: 52.121,9.604 44.258,10.335 52.09,18.65 54.404,30.933
I\N\T\/SQW: P2.1
IORET: P1.7
M\_\A\C\P\R\: U1.10
M\_\C\H\R\G\: P4.8 R10.2 R11.1 U1.3 | length 50.9
  Top Layer w0.3: R11.1 R10.2 v1(21.094,40.434) U1.3
  Mid-Layer2 w0.3: v1(21.094,40.434) 22.396,40.434 23.381,39.449 23.381,35.285 25.022,33.644 36.901,33.644 45.892,42.635 P4.8
MISO: P5.1 P6.1 | length 5.1
  Top Layer w0.203: v1(60.16,30.62) P5.1
  Bottom Layer w0.203: v1(60.16,30.62) P6.1
MOIS: P5.4 P6.4 | length 3.9
  Top Layer w0.203: v1(65.691,26.905) 66.866,28.08 P5.4
  Bottom Layer w0.203: v1(65.691,26.905) 66.866,28.08 P6.4
NetC1_1: C1.1 U1.4 | length 3.1
  Top Layer w0.3: C1.1 24.478,39.74 24.672,39.934 U1.4
NetC3_1: C3.1 D1.2 R1.1 U1.8 | length 10.2
  Top Layer w0.3: C3.1 29.903,45.6 29.603,45.3 D1.2 ; U1.8 29.798,40.434 29.603,40.629 D1.2 ; R1.1 D1.2
NetD3_2: D3.2 P1.4 | length 5.3
  Top Layer w0.5: P1.4 38.312,5.811 38.901,6.4 D3.2
NetLED1_2: LED1.2 R14.1 | length 2.7
  Top Layer w0.203: R14.1 37.738,29.5 37.824,29.586 39.137,29.586 LED1.2
NetLED1_3: LED1.3 R13.1 | length 5.2
  Top Layer w0.203: R13.1 40.195,31 40.7,30.495 LED1.3
NetLED1_4: LED1.4 R12.1 | length 6.8
  Top Layer w0.203: R12.1 36.575,27.175 37.023,26.727 40.255,26.727 40.7,27.172 LED1.4
NetLED2_2: LED2.2 R18.1 | length 2.9
  Top Layer w0.203: R18.1 37.456,24 38.005,24.549 LED2.2
NetLED2_3: LED2.3 R17.1 | length 4.9
  Top Layer w0.203: R17.1 40.315,25.5 40.7,25.115 LED2.3
NetLED2_4: LED2.4 R16.1 | length 5.6
  Top Layer w0.203: R16.1 37.949,22.5 38.421,22.028 40.355,22.028 40.7,22.373 LED2.4
NetLED3_2: LED3.2 R21.1 | length 3
  Top Layer w0.203: LED3.2 21.296,18.351 21.745,18.8 R21.1
NetLED3_3: LED3.3 R20.1 | length 5.1
  Top Layer w0.203: LED3.3 18.9,17.699 19.299,17.3 R20.1
NetLED3_4: LED3.4 R19.1 | length 6.8
  Top Layer w0.203: LED3.4 18.9,20.907 19.273,21.279 22.941,21.279 23.225,20.996 R19.1
NetLED4_2: LED4.2 R24.1 | length 3
  Top Layer w0.203: LED4.2 21.457,23.851 21.806,24.2 R24.1
NetLED4_3: LED4.3 R23.1 | length 5.3
  Top Layer w0.203: LED4.3 18.9,23.009 19.209,22.7 R23.1
NetLED4_4: LED4.4 R22.1 | length 6.7
  Top Layer w0.203: LED4.4 18.9,26.271 19.307,26.677 22.941,26.677 23.225,26.394 R22.1
NetLED5_2: LED5.2 R27.1 | length 3.1
  Top Layer w0.203: LED5.2 21.372,28.851 21.922,29.4 R27.1
NetLED5_3: LED5.3 R26.1 | length 5.2
  Top Layer w0.203: LED5.3 18.9,28.103 19.103,27.9 R26.1
NetLED5_4: LED5.4 R25.1 | length 7
  Top Layer w0.203: LED5.4 18.9,31.502 19.277,31.88 22.961,31.88 23.225,31.615 R25.1
NetLED6_2: LED6.2 R30.1 | length 3.1
  Top Layer w0.203: LED6.2 21.364,34.251 21.914,34.8 R30.1
NetLED6_3: LED6.3 R29.1 | length 5.1
  Top Layer w0.203: LED6.3 18.9,33.599 19.199,33.3 R29.1
NetLED6_4: LED6.4 R28.1 | length 7.1
  Top Layer w0.203: LED6.4 18.9,36.969 19.316,37.385 22.873,37.385 23.225,37.033 R28.1
NetQ1_1: Q1.1 R1.2 U1.9 | length 5.4
  Top Layer w0.203: U1.9 32.378,40.934 32.644,41.2 Q1.1 33.803,43.675 R1.2
NetQ1_2: Q1.2 U1.7 | length 3.1
  Top Layer w0.203: U1.7 32.181,39.934 32.799,40.552 Q1.2
NetQ1_3: Q1.3 R14.2 R18.2 | length 24
  Top Layer w0.203: v1(33.233,22.775) 33.473,22.775 34.697,24 R18.2 ; Q1.3 33.051,39.905 32.431,39.285 32.431,31.222 v1(34.153,29.5) R14.2
  Bottom Layer w0.203: v1(33.233,22.775) 32.58,22.775 32.217,23.138 32.217,27.564 v1(34.153,29.5)
NetQ2_2: Q2.2 R4.2 | length 1.9
  Top Layer w0.203: R4.2 24.06,7.243 Q2.2
NetQ2_3: Q2.3 Q3.2 R5.2 | length 4.3
  Top Layer w0.203: Q3.2 25.548,10.593 25.875,10.266 R5.2 25.875,8.931 26.608,8.197 Q2.3
NetQ2_5: Q2.5 R6.2 | length 1.9
  Top Layer w0.203: Q2.5 27.653,7.525 R6.2
NetQ2_6: Q2.6 Q3.4 R7.2 TP6.1 | length 16.8
  Top Layer w0.203: Q2.6 26.192,5.827 26.598,5.422 30.38,5.422 30.8,5.842 TP6.1 31.827,7.827 31.827,11.124 31.276,11.675 R7.2
  Top Layer w0.5: Q3.4 27.331,11.3 27.706,11.675 R7.2
NetQ3_5: Q3.5 R8.1 TP7.1 | length 6
  Top Layer w0.203: 27.484,12.596 27.625,12.737 27.688,12.8
  Top Layer w0.5: Q3.5@26.519,12.596 27.484,12.596 ; 27.625,12.737 R8.1 ; 27.688,12.8 TP7.1
NetQ4_1: Q4.1 R12.2 R16.2 | length 14
  Top Layer w0.203: Q4.1 33.533,25.9 33.785,25.648 33.785,24.671 33.624,24.511 v1(33.189,24.511) 32.519,24.511 32.111,24.103 32.111,22.644 32.694,22.06 33.895,22.06 34.335,22.5 R16.2 ; v1(34.079,28) R12.2
  Bottom Layer w0.203: v1(33.189,24.511) 33.189,27.11 v1(34.079,28)
NetQ4_3: Q4.3 R13.2 R17.2 | length 10.3
  Top Layer w0.203: Q4.3 34.77,27.195 v1(35.225,26.74) R17.2 ; R13.2 v1(35.225,32.078)
  Bottom Layer w0.203: v1(35.225,26.74) v1(35.225,32.078)
NetQ5_1: Q5.1 R19.2 R22.2 R25.2 R28.2 | length 24.6
  Top Layer w0.203: R19.2 25.615,20.3 25.873,20.559 25.873,22.483 26.19,22.8 Q5.1 27.5,24.722 26.523,25.7 ; R22.2 26.523,25.7 ; R25.2 26.253,30.9 v1(26.55,30.603) 26.55,25.728 26.523,25.7 ; R28.2 v1(25.88,36.3)
  Bottom Layer w0.203: v1(25.88,36.3) 26.55,35.63 v1(26.55,30.603)
NetQ5_3: Q5.3 R20.2 R23.2 R26.2 R29.2 | length 27.9
  Top Layer w0.203: R20.2 26.104,17.3 26.559,17.755 v1(26.559,20.937) 26.559,21.224 26.84,21.505 Q5.3 ; v1(24.575,21.612) R23.2 ; v1(24.575,26.884) R26.2 R26.2@24.577,27.898 ; v1(24.575,32.322) R29.2
  Bottom Layer w0.203: v1(24.575,26.884) 26.036,26.884 26.733,26.187 ; v1(24.575,32.322) 24.575,31.563 26.733,29.404 26.733,26.187 ; v1(26.559,20.937) 24.746,20.937 24.575,21.108 v1(24.575,21.612) 24.575,22.7 25.075,23.2 26.081,23.2 26.733,23.853 26.733,26.187
NetQ6_1: Q6.1 R21.2 R24.2 R27.2 R30.2 | length 30.3
  Top Layer w0.203: R21.2 v1(25.71,18.8) ; R24.2 v1(25.72,24.2) ; R27.2 v1(25.694,29.4) ; R30.2 v1@25.703,34.8 ; v1(25.694,34.79) v1@25.703,34.8 ; Q6.1 26.658,34.5 26.358,34.8 v1@25.703,34.8
  Mid-Layer2 w0.203: v1@25.71,24.19 v1(25.72,24.2)
  Bottom Layer w0.203: v1(25.694,29.4) 24.3,29.4 23.65,28.75 ; v1(25.694,34.79) 24.565,34.79 23.65,33.875 23.65,28.75 ; v1(25.71,18.8) 24.511,18.8 23.65,19.661 23.65,23.275 ; v1(25.72,24.2) 24.575,24.2 23.65,23.275 ; 23.65,23.275 23.65,28.75
NetR2_1: R2.1 U1.6 | length 12.2
  Top Layer w0.203: R2.1 20.852,38.226 30.264,38.226 30.985,38.946 U1.6
NetR3_1: R3.1 U1.2 | length 2.6
  Top Layer w0.3: R3.1 25.207,41.406 25.679,40.934 U1.2
NetR32_2: R32.2 U2.3 | length 4.6
  Top Layer w0.203: U2.3@47.417,34.725 U2.3
  Top Layer w0.3: R32.2 U2.3@47.417,34.725
R_CH1: P4.4 Q1.4 | length 30.6
  Top Layer w0.3: v1(33.803,38.259) Q1.4
  Mid-Layer2 w0.3: v1(33.803,38.259) 34.769,39.224 v1(38.725,39.224)
  Bottom Layer w0.3: v1(38.725,39.224) 47.892,39.224 56.092,47.424 P4.4
R_CH2/C: P3.2 Q6.2 TP10.1 | length 31.2
  Top Layer w0.3: Q6.2 26.914,33.852 26.59,33.528 26.59,32.11 TP10.1 30.229,30.3 v1(31.237,31.308)
  Bottom Layer w0.3: v1(31.237,31.308) 31.237,40.859 39.208,48.83 P3.2
RESET_N: P1.6 P5.5 P6.5 U2.4 | length 62.1
  Top Layer w0.5: U2.4 50.511,33.435 52.054,31.892 52.054,27.522 54.036,25.54 P5.5
  Bottom Layer w0.3: P1.6 33.192,12.539 34.284,13.631 34.284,18.783 43.797,28.295 v1(52.051,28.295)
  Bottom Layer w0.5: v1(60.069,25.54) P6.5
SCK: P5.3 P6.3 | length 5.3
  Top Layer w0.203: v1(60.079,28.08) P5.3
  Bottom Layer w0.203: v1(60.079,28.08) P6.3
SCL: J1.4 P3.10 U2.16 | length 64.4
  Top Layer w0.3: v1(20.6,47.998) 52.633,47.998 56.537,44.094 U2.16
  Bottom Layer w0.3: J1.4 11.141,44.01 15.151,44.01 18.968,47.827 ; P3.10 18.968,47.827 ; v1(20.6,47.998) 19.139,47.998 18.968,47.827
SDA: JP1.3 P3.9 U2.15 | length 57.4
  Top Layer w0.3: JP1.3 17.086,45.72 18.54,47.174 ; P3.9 21.508,50.142 18.54,47.174 ; U2.15 54.959,35.975 54.59,36.344 54.59,44.686 52.102,47.174 18.54,47.174
VDD_BT_CHG: D1.1 J4.1 | length 52.3
  Top Layer w0.203: D1.1@27.701,43.698 D1.1
  Top Layer w1: J4.1 10.82,37.909 19.055,46.144 26.265,46.144 27.703,44.706 D1.1
VIN: P1.1
pads on no net: P1.8 Q6.3 Q6.4 Q6.5 SH-JP2.0

## Polygon pours and split planes (outlines as drawn)
GND on Mid-Layer1 "Mid_Layer_1-GND" (solid, remove dead copper, pour order 12): 0.511,53.045 0.521,53.034 65.404,53.034 66.746,51.692 66.746,51.473 66.746,39.436 67.372,38.81 69.63,36.552 69.63,35.686 69.63,6.653 68.914,5.937 66.736,3.759 66.736,2.167 66.736,1.103 66.149,0.516 66.13,0.536 1.01,0.536 0.506,1.04 0.515,1.049 0.515,53.038
BAT+ on Mid-Layer2 "Mid_Layer_1-BAT+" (solid, remove dead copper, pour order 18): 0.488,53.036 0.489,53.034 65.232,53.034 66.628,51.639 66.643,51.624 66.643,39.522 66.643,39.441 69.518,36.566 69.549,36.535 69.549,6.681 69.549,6.635 66.658,3.744 66.663,3.74 66.663,0.711 66.636,0.711 66.43,0.505 66.384,0.551 0.994,0.551 0.63,0.551 0.509,0.672 0.509,53.033 0.492,53.05
GND on Top Layer "Mid_Layer_1-BAT+" (solid, remove dead copper, pour order 24): -0.502,54.077 -0.463,54.116 70.556,54.116 70.556,-0.607 70.554,-0.609 70.454,-0.509 -0.541,-0.509 -0.541,54.115 -0.539,54.116 -0.467,54.116
GND on Bottom Layer "Mid_Layer_1-BAT+" (solid, remove dead copper, pour order 26): -0.518,54.078 -0.491,54.105 70.567,54.105 70.567,-0.555 70.539,-0.527 -0.525,-0.527 -0.525,54.108 -0.52,54.112

## Keep-outs
Keep-Out Layer:
  lines w0.254: 0.081,1.108 0.081,52.626 cw(c1.039,52.55) 1.089,53.51 65.362,53.51 ; 0.083,1.149 ccw(c1.043,1.099) 0.805,0.167 ; 0.807,0.163 ccw(c1.077,0.845) 1.062,0.112 ccw(c1.271,1.147) 1.345,0.094 66.192,0.094 ccw(c65.569,1.543) 67.054,1.011 67.054,3.581 69.977,6.504 69.977,36.712 67.056,39.633 67.056,51.816 65.364,53.508

## Other copper
Top Layer:
  rectangle net GND: 28.192,20.455 29.245,23.205
  rectangle net GND: 31.029,25.521 32.128,28.202
  rectangle net GND: 39.531,1.382 44.512,4.031
Bottom Layer:
  rectangle net GND: 39.531,1.38 44.512,4.031

## Silkscreen, mask and mechanical layers (free items; w line width, h text height)
Top Overlay:
  drawing of 2321 lines, arcs and shapes, not listed
  text "Battery Charger" at 21.821,47.5 h2
  text "ATOM2 PW & /  GPIO (J1)" at 12.1,29.3 h2.29 r90
  text "RTC" at 50.6,25.3 h2
  text "LED2" at 15.397,25.1 h2.29 r90
  text "LED1" at 44.4,25.1 h2.29 r90
  text "ICSP" at 63.171,22.271 h2.29
  text "ATOM1 PW / (J2)" at 12.1,21.6 h2.29 r90
  text "PWM" at 33.589,17.251 h2.29 r90
  text "ACCS_SW" at 46.6,17.1 h2.29 r90
  text "ATOM_PW" at 59.2,16.2 h2.29
  text "BAT PW / J3" at 11.7,14.2 h2.29 r90
  text "BLE_SW" at 46.6,8.7 h2.29 r90
  text "ATOM DRV" at 18.3,7.9 h1.4 r90
  text "BAT CHARGER /  LEVEL" at 36.9,6.691 h1.25 r90
  text "EXT PW (J4)" at 14.3,2.7 h2.29 r90
Bottom Overlay:
  drawing of 2266 lines, arcs and shapes, not listed
  text "ICSP" at 66.668,32.263 h2.29